# Altium PCB Thruster_Board.PcbDoc
Units mil, origin at the board's own origin, x right, y up, seen from the top; angles counter-clockwise.
Board outline 6000 x 4000 mil, 2 copper layers (Top Layer, Bottom Layer); 30 components, 18 nets, 91 pads, 0 vias.
Unrouted connection lines stored in the file: 64.
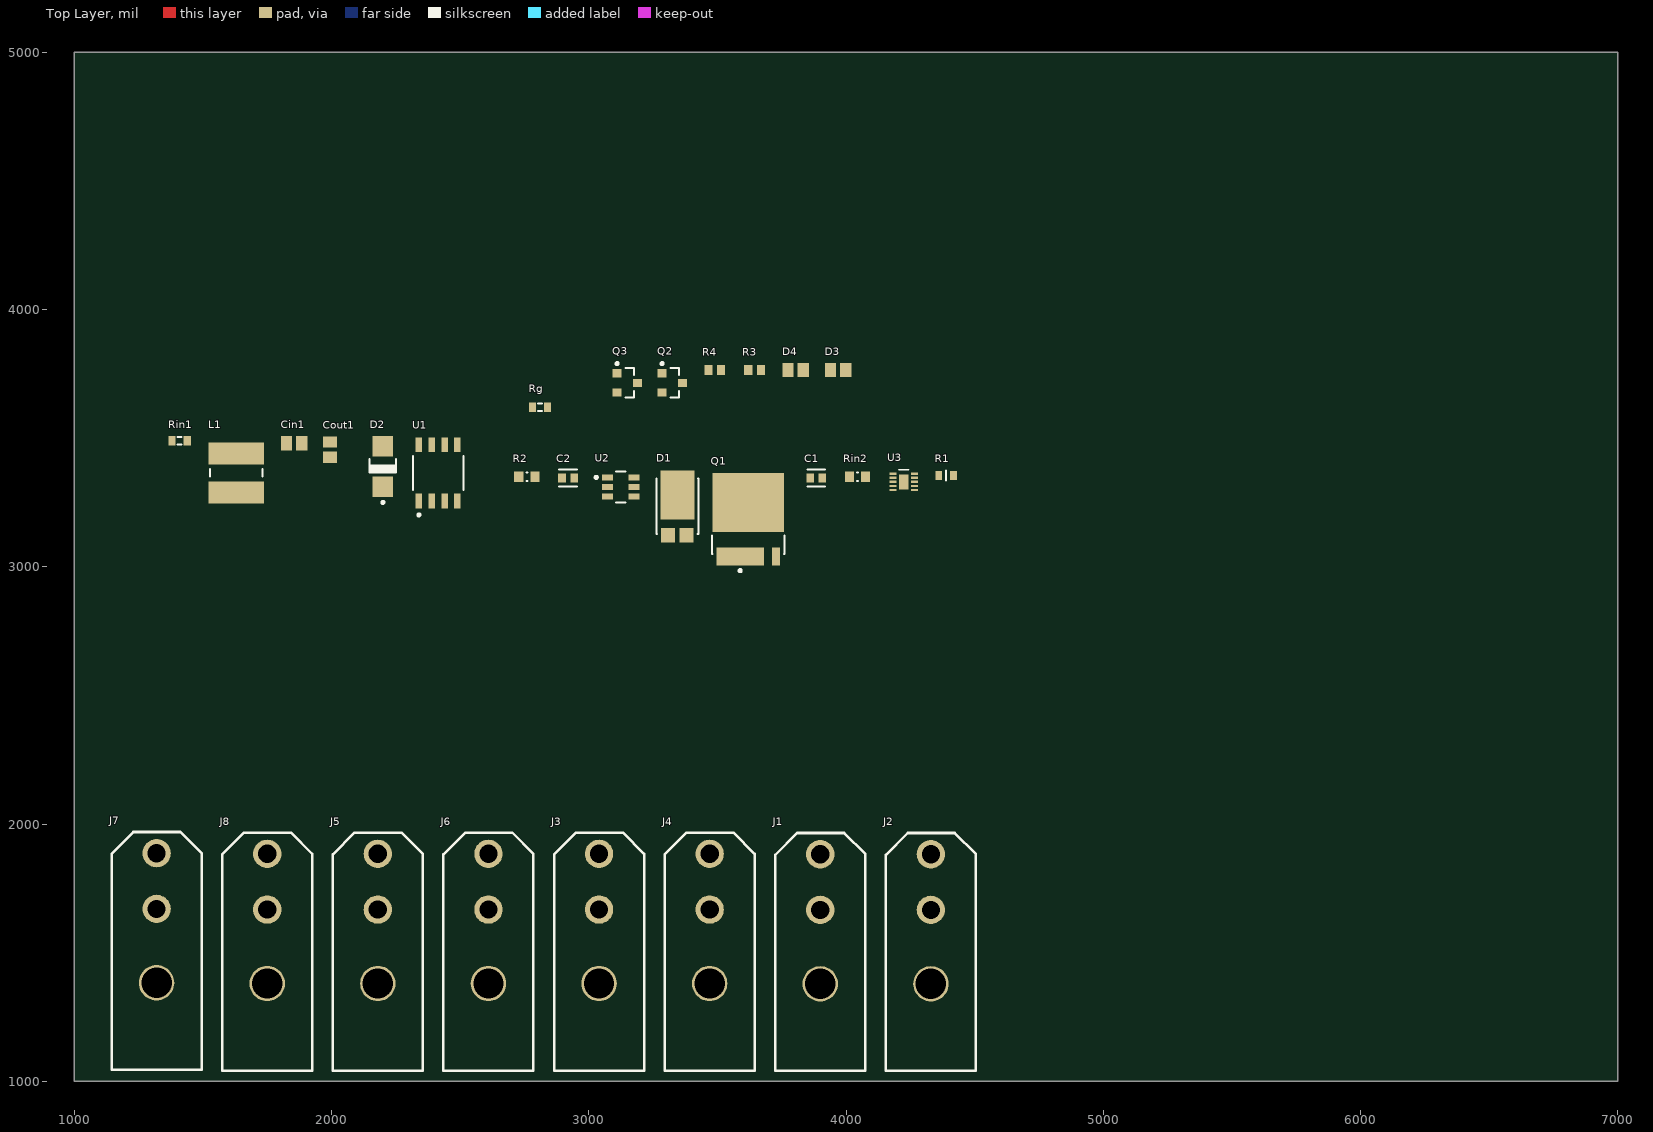
[diagram p0: Top Layer view]
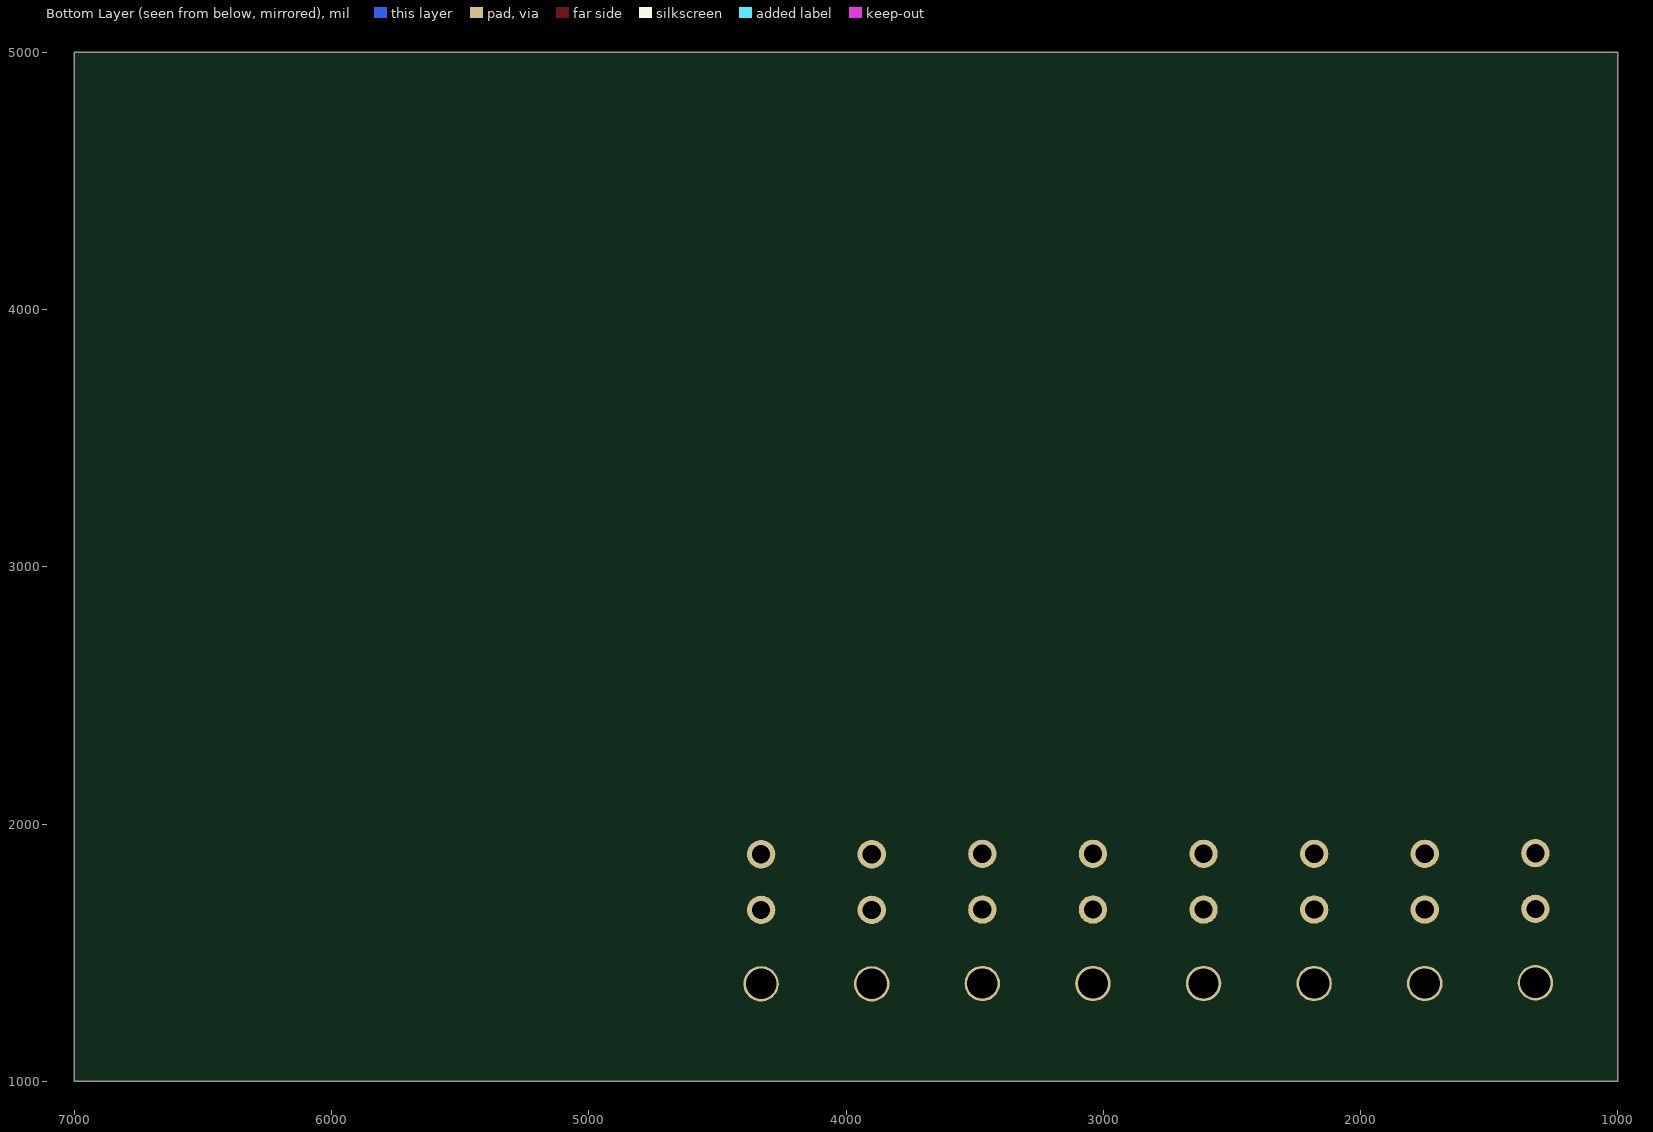
[diagram p1: Bottom Layer view, seen from below]

## Layer stack, top to bottom
Top Solder: solder mask 0.4, Solder Resist, Dk 3.5
Top Layer: signal copper 1.4
Dielectric 1: dielectric 12.6, FR-4, Dk 4.8
Bottom Layer: signal copper 1.4
Bottom Solder: solder mask 0.4, Solder Resist, Dk 3.5

## Board outline
1000,1000 7000,1000 7000,5000 1000,5000

## Design rules (kind name [scope] priority, off if disabled: settings)
Clearance [All] p1: gap=10 ignorepadtopadclearanceinfootprint=FALSE except(0: Arc-Hole Track-Hole SMDPad-Hole THPad-Hole Via-Hole Fill-Hole Poly-Hole Region-Hole Text-Hole)
PolygonConnect [All] p1: connectstyle=Relief reliefconductorwidth=10 reliefentries=4 polygonreliefangle="90 Angle" airgapwidth=10
RoutingVias [All] p1: holewidth=28 width=50 viastyle="Through Hole" minholewidth=28 minwidth=50 maxholewidth=28 maxwidth=50
SolderMaskExpansion [All] p1: expansion=4 istentingtop=FALSE
Width [All] p1: maxlimit=10 minlimit=10 preferedwidth=10
30 further rules are at their usual default settings.

## Components (designator, comment, footprint, x,y, rotation, side; value= is the part's Value field where it differs from the comment)
C1 "0.1uF" FP-C0603C-CF-MFG 3884.5,3345 r0 top value="0.10 μF"
C2 "0.1uF" FP-C0603C-CF-MFG 2919.5,3345 r0 top value="0.10 μF"
Cin1 "X7R" C0805 1854.5,3480 r0 top value=1uF
Cout1 "X7R" C0805 1994.5,3455 r90 top value=1uF
D1 "SBRT15U50SP5-13" FP-PowerDI5-MFG 3344.5,3235 r90 top
D2 "1SMA5931BT3G" ONSC-SMA-2-403D-02_F_V 2199.5,3390 r90 top
D3 "LED RED" C0805 3969.5,3765 r0 top
D4 "LED RED" C0805 3804.5,3765 r0 top
J1 "" "2-pin Megafit RA" 3900,1040 r0 top
J2 "" "2-pin Megafit RA" 4330,1040 r0 top
J3 "" "2-pin Megafit RA" 3040,1041.42 r0 top
J4 "" "2-pin Megafit RA" 3470,1041.42 r0 top
J5 "" "2-pin Megafit RA" 2180,1041.42 r0 top
J6 "" "2-pin Megafit RA" 2610,1041.42 r0 top
J7 "" "2-pin Megafit RA" 1320,1044.02 r0 top
J8 "" "2-pin Megafit RA" 1750,1041.42 r0 top
L1 "74477420" WE-PD2-M 1629.5,3365 r90 top
Q1 "IAUA250N04S6N007AUMA1" FP-PG-HSOF-5-MFG 3620,3185 r0 top
Q2 "NVTR01P02LT1G" ONSC-SOT-23-3-318-08_V 3324.5,3715 r0 top
Q3 "NVTR01P02LT1G" ONSC-SOT-23-3-318-08_V 3149.5,3715 r0 top
R1 "7.5K 0.1W 1%" FP-ERJ3EK-MFG 4389.5,3355 r0 top
R2 "10K" RESC0603(1608)_N 2759.5,3350 r0 top value="10000.00 Ohm"
R3 "100R" RESC1609X50X30NL10T20 3644.5,3765 r0 top
R4 "100R" RESC1609X50X30NL10T20 3489.5,3765 r0 top
Rg "0603" J1-0603 2810,3620 r0 top value=100R
Rin1 "0603" J1-0603 1409.5,3490 r0 top value=10k
Rin2 "10K" RESC0603(1608)_N 4044.5,3350 r0 top value="10000.00 Ohm"
U1 "AUIR3241STR" FP-PG-DSO-8-MFG 2414.5,3365 r90 top
U2 "SN74LVC1G97DBVR" FP-DBV0006A-MFG 3124.5,3310 r0 top
U3 "Part Number: INA300AIDSQT" DSQ10_P9X1P5 4224.5,3330 r0 top value=Value

## Footprints (in the part's own frame and the unit in brackets; to place one, negate y for a bottom-side part, rotate by r counter-clockwise, add the part's x,y. Pads: shape width x height; smd on the part's side, far side on the other; paste and mask are expansions set on the pad)
"2-pin Megafit RA" [mm]
  round 2.8 hole 1.8: 1(0,15.9) 2(0,21.4)
  round 3.5 hole 3: ""(0,8.6)
  silkscreen extent -4.44,0 4.44,23.49, body extent -4.16,-24.98 4.19,21.9, height 16.75
C0805 [mm] "Chip Capacitor, Body 2.0x1.3mm, IPC High Density"
  rect 1.1x1.4 smd: 1(-0.75,0) 2(0.75,0)
  body extent -1.1,-0.72 1.1,0.72, height 1.4
DSQ10_P9X1P5 [mm]
  rect 0.7x0.23 smd paste-0.115 mask+0: 1(-1.05,0.8) 2(-1.05,0.4) 3(-1.05,0) 4(-1.05,-0.4) 5(-1.05,-0.8) 6(1.05,-0.8) 7(1.05,-0.4) 8(1.05,0) 9(1.05,0.4) 10(1.05,0.8)
  rect 0.914x1.499 smd paste-0.737 mask-0.737: 11(0,0)
  Top Layer region: 0,0.749 0,0.749 0,0.749 0,0.749 0,0.749 0,0.749 0,0.749 0,0.749
  Top Layer region: 0,-0.749 0,-0.749 0,-0.749 0,-0.749 0,-0.749 0,-0.749 0,-0.749 0,-0.749
  silkscreen extent -0.5,1.18 0.5,1.18, body extent -1.05,-1.05 1.05,1.05, height 0.79
FP-C0603C-CF-MFG [mm]
  rect 0.75x0.9 smd paste+0 mask+0: 1(-0.6,0) 2(0.6,0)
  silkscreen extent -0.87,-0.85 0.88,0.85, body extent -1.2,-0.6 1.2,0.6, height 0.25
FP-DBV0006A-MFG [mm]
  rrect17% 1.1x0.6 smd paste+0 mask+0: 1(-1.3,0.95) 2(-1.3,0) 3(-1.3,-0.95) 4(1.3,-0.95) 5(1.3,0) 6(1.3,0.95)
  silkscreen extent -2.55,-1.53 0.45,1.53, body extent -1.95,-1.78 1.95,1.78, height 0.25
FP-ERJ3EK-MFG [mm]
  rect 0.65x0.9 smd paste+0 mask+0: 1(-0.725,0) 2(0.725,0)
  silkscreen extent 0,-0.48 0,0.48, body extent -1.15,-0.58 1.15,0.58, height 0.25
FP-PG-DSO-8-MFG [mm]
  rect 1.45x0.65 smd paste+0 mask+0: 1(-2.775,1.905) 2(-2.775,0.635) 3(-2.775,-0.635) 4(-2.775,-1.905) 5(2.775,-1.905) 6(2.775,-0.635) 7(2.775,0.635) 8(2.775,1.905)
  silkscreen extent -4.27,-2.5 1.68,2.5, body extent -3.6,-2.6 3.6,2.6, height 0.25
FP-PG-HSOF-5-MFG [mm]
  rect 4.7x1.75 smd paste-1000 mask+0: 1-2-3-4(-0.8,-3.675)
  rect 0.8x1.75 smd paste-1000 mask+0: 5(2.75,-3.675)
  rect 7.1x5.8 smd paste-1000 mask+0: 6(0,1.651)
  silkscreen extent -3.6,-5.2 3.6,-1.62, body extent -3.7,-4.65 3.7,4.65, height 0.25
FP-PowerDI5-MFG [mm]
  rect 1.4x1.39 smd paste+0 mask+0: 1(-2.862,0.92) 3(-2.862,-0.92)
  rect 4.86x3.36 smd paste+0 mask+0: 2(1.12,0)
  silkscreen extent -2.73,-2.07 2.73,2.07, body extent -3.66,-2.12 3.65,2.12, height 0.25
J1-0603 [mm] "Chip Resistor, Body 1.6x0.8mm, IPC High Density"
  rect 0.7x0.9 smd: 1(-0.75,0) 2(0.75,0)
  silkscreen extent -0.2,-0.35 0.2,0.35, body extent -0.85,-0.48 0.85,0.48, height 0.9
ONSC-SMA-2-403D-02_F_V [mm] "Molded, 2-Leads, Body 4.32x2.6mm"
  rect 2x2 smd: 1(-2,0) 2(2,0)
  silkscreen extent -3.67,-1.3 0.74,1.3, body extent -2.16,-1.3 2.16,1.3, height 2.2
ONSC-SOT-23-3-318-08_V [mm] "SOT23, 3-Leads, Body 2.92x1.3mm, Pitch 0.95mm"
  rect 0.9x0.8 smd: 1(-1,0.95) 2(-1,-0.95) 3(1,0)
  silkscreen extent -1.12,-1.46 0.65,2.02, body extent -0.65,-1.46 0.65,1.46, height 1.11
RESC0603(1608)_N [mm] "Chip Resistor, Body 1.6x0.8mm, IPC Medium Density"
  rect 0.9x1 smd: 1(-0.8,0) 2(0.8,0)
  silkscreen extent -0.05,-0.4 0.05,0.4, body extent -0.85,-0.47 0.85,0.47, height 0.6
RESC1609X50X30NL10T20 [mm] "Chip Resistor, 2-Leads, Body 1.55x0.85mm, IPC Medium Density"
  rect 0.8x0.95 smd: 1(-0.625,0) 2(0.625,0)
  body extent -0.82,-0.48 0.82,0.48, height 0.5
WE-PD2-M [mm] "SMD Inductor, 2-Leads, Body 5.8 x 5.2 mm"
  rect 2.15x5.5 smd: 1(-1.925,0) 2(1.925,0)
  silkscreen extent -0.38,-2.6 0.38,2.6, body extent -2.89,-2.6 2.89,2.6, height 4.49

## Part data
C1 C2: library part CMP-1035-02580-3, "CAP CER 0.1UF 10V X7R 0603", Capacitance="0.10 μF", Manufacturer=KEMET, Manufacturer Part Number=C0603C104K8RACTU, Package=C0603C-CF, Temperature="-55°C to +125°C", Temperature Characteristic=X7R, Temperature Coefficient=30ppm/°C, Temperature Range High=+125°C, Temperature Range Low=-55°C, Tolerance=0.1, Voltage Rating="10 V", Automotive=Yes, Automotive Grade="Grade 1", Category=Cap, ComponentLink2Description=Datasheet, ComponentLink2URL=https://api.kemet.com/component-edge/download/datasheet/C0603C100J5GACAUTO.pdf, Device Class L1="Passive Components", Device Class L2=Capacitors, Device Class L3="Ceramic Capacitors", Digikey Description="CAP CER 0.1UF 10V X7R 0603", Height=0.87mm, Lead Free=Yes, Material=Ceramic, Mouser Description="Multilayer Ceramic Capacitors MLCC - SMD/SMT 10volts 0.1uF X7R 10%", Octopart=https://octopart.com/c0603c104k8ractu-kemet-145075, RoHS=TRUE
Cin1 Cout1: library part Cap, "Capacitor", LatestRevisionDate=17-Jul-2002, LatestRevisionNote="Re-released for DXP Platform.", PackageDescription="Radial Cap, Thru-Hole; 2 Leads; 0.3 in Pin Spacing", PackageReference=RAD-0.3, Published=8-Jun-2000, Publisher="Altium Limited"
D1: library part CMP-12791-000016-1, "50V 15A Rectifier Schottky Diode", Forward Current=3A, Manufacturer="Diodes Inc.", Manufacturer Part Number=PDS3200-13, Max Junction Temp=+150°C, Max Repetitive Reverse Voltage=200V, Max Surge Forward Current=180A, Package=PowerDI5, Peak Reverse Current=1uA, Temperature="-65°C to +150°C", Temperature Range Low=-65°C, Automotive=No, Category=Diode, ComponentLink2Description=Datasheet, ComponentLink2URL=https://www.diodes.com/assets/Datasheets/ds30470.pdf, Device Class L1="Discrete Semiconductors", Device Class L2=Diodes, Device Class L3="Rectifier Diodes", Digikey Description="DIODE SCHOTTKY 200V 3A POWERDI5", Footprint Url=https://www.diodes.com/assets/Package-Files/PowerDI5.pdf, Height=1.15mm, Lead Free=Yes, Mouser Description="PDS3200 Series 200 V 3 A High Voltage Schottky Barrier Rectifier - PowerDI-5", Octopart=https://octopart.com/pds3200-13-diodes+inc.-332544, Reverse Voltage=200V, RoHS=TRUE, Standoff Height=0mm, Temperature Range High=+150°C
D2: library part CMP-1060-00118-1, "1.5 W Zener Voltage Regulator, 2-Pin SMA, Pb-Free, Tape and Reel", Manufacturer="On Semiconductor", ComponentLink1Description="Manufacturer URL", ComponentLink1URL=http://www.onsemi.com/, ComponentLink2Description=Datasheet, ComponentLink2URL=http://www.onsemi.com/pub_link/Collateral/1SMA5913BT3-D.PDF, ComponentLink3Description="Package Specification", ComponentLink3URL=http://www.onsemi.com/pub_link/Collateral/1SMA5913BT3-D.PDF, DatasheetVersion="Rev. 8", Mounting Technology="Surface Mount", PackageDescription="2-Pin Small Molded Package, J-Bend Lead, Body 2.605 x 4.315 mm", PackageReference=SMA-2-403D-02_F, PackageVersion="Rev. F, 11/2008", Packing="Tape and Reel", PartNumber=1SMA5931BT3G, RoHS=Pb-Free, VZ Typ (V)=18
D3 D4: library part LED0, "led /  LTST-C171KRKT", Color=Red, Current - Test=20mA, Lens Color=Colorless, Manufacturer="Lite-On Inc.", Manufacturer Part Number=LTST-C171KRKT, Millicandela Rating=54mcd, Package / Case="0805 (2012 Metric)", Supplier Part Number 1=160-1427-1-ND, Voltage - Forward (Vf) (Typ)=2V, Category=Optoelectronics, ComponentLink1Description=http://optoelectronics.liteon.com/upload/download/DS22-2000-109/LTST-C171KRKT.pdf, ComponentLink1URL=http://optoelectronics.liteon.com/upload/download/DS22-2000-109/LTST-C171KRKT.pdf, Features=-, Height (Max)=0.80mm, Lens Style/Size="Rectangle with Flat Top, 1.40mm x 1.25mm", Lens Transparency=Clear, Mounting Type="Surface Mount", Packaging="Cut Tape (CT)", Part Status=Active, Pricing 1="1=0.31, 10=0.225, 25=0.1656, 100=0.1183, 250=0.0804, 500=0.07096, 1000=0.05558 (USD)", RoHS="RoHS Compliant", Size / Dimension="2.00mm L x 1.25mm W", Stock 1=260544, Supplier 1=Digi-Key, Viewing Angle=130°, Wavelength - Dominant=631nm, Wavelength - Peak=639nm
J1 J2 J3 J4 J5 J6 J7 J8: library part "2-pin megafit"
L1: library part CMP-0227-00441-1, "SMD Power Inductor WE-PD2, L = 100 µH", Inductance="100 ÂµH", ComponentLink1Description="Manufacturer Link", ComponentLink1URL=http://www.we-online.com, ComponentLink2Description=Datasheet, ComponentLink2URL=http://www.we-online.de/katalog/media/pdf/74477420.pdf, DatasheetVersion="ver 2, Jun-2005", PackageDescription="SMD Inductor, 2-Leads, Body 5.8 x 5.2 mm", PackageReference=WE-PD2-M, PackageVersion=2005
Q1: library part CMP-32901-001165-1, "MOSFET_(20V 40V) PG-HSOF-5"
Q2 Q3: library part CMP-1058-00752-1, "Power MOSFET, -20 V, -1.3 A, P-Channel, 3-Pin SOT-23, Pb-Free, Tape and Reel", Manufacturer="On Semiconductor", Package Type=SOT-23-3, Channel Polarity="P Channel", Ciss Typ (pF)=225, ComponentLink1Description="Manufacturer URL", ComponentLink1URL=http://www.onsemi.com/, ComponentLink2Description=Datasheet, ComponentLink2URL=http://www.onsemi.cn/pub_link/Collateral/NTR1P02LT1-D.PDF, ComponentLink3Description="Package Specification", ComponentLink3URL=http://www.onsemi.cn/pub_link/Collateral/318-08.PDF, Configuration=Single, Coss Typ (pF)=130, Crss Typ (pF)=55, DatasheetVersion="Rev. 13", ID Max (A)=1.3, Mounting Technology="Surface Mount", PackageDescription="3-Pin Small Outline Transistor, Body 2.92 x 1.3 mm, Pitch 0.95 mm", PackageReference=SOT-23-3-318-08, PackageVersion="Rev. AP, 11/2009", Packing="Tape and Reel", PartNumber=NVTR01P02LT1G, PD Max (W)=0.4, Qrr Typ (nC)=8.5, RoHS=Pb-Free, V(BR)DSS Min (V)=20, VGS Max (V)=12, VGS(th) Max (V)=1.25
R1: library part CMP-2000-00636-2, "RES SMD 7.5K OHM 1% 1/10W 0603", Case Code (Imperial)=0603, Case Code (Metric)=1608, Max Operating Temperature=155°C, Max Power Dissipation=100mW, Min Operating Temperature=-55°C, Package Quantity=1, Resistance=7.5kR, Resistance Tolerance=1%, Resistor Type="Thick Film", Temperature Coefficient=100ppm/°C, Voltage Rating=75V, Voltage Rating (DC)=50V, Case/Package=0603, Construction=Rectangular, Contact Plating=Tin, Depth=0.8mm, Features="Automotive AEC-Q200", Height=0.022inch, Lead Free="Lead Free", Length=1.6mm, Military Standard=Not, Mount="Surface Mount", Number of Terminations=2, Packaging="Tape and Reel", Power Rating=100mW, Radiation Hardening=No, REACH SVHC="No SVHC", RoHS Compliant=Yes, Series=ERJ, Termination=SMD/SMT, Tolerance=1%, Width=0.8mm
R2 Rin2: library part CMP-1012-00098-1, "10K 0.1W 5% 0603 (1608 Metric)  SMD", Case-EIA=0603, Case-Metric=1608, Power="0.1 W", Tolerance="5 %", Technology=SMT
R3 R4: library part CMP-1012-00050-2, "100R 0.1W 5%", Manufacturer="Vishay Dale", Part Number=CRCW0603100RJNTA
Rg Rin1: library part Res3, "Resistor", LatestRevisionDate=29-May-2009, LatestRevisionNote="IPC-7351 Footprint Added.", PackageDescription="Chip Resistor", PackageReference=J1-0603, Published=8-Jun-2000, Publisher="Altium Limited"
U1: library part CMP-32851-000034-1, "IC GATE DRVR HIGH-SIDE 8SO", Case/Package=SOIC, Max Operating Temperature=150°C, Min Operating Temperature=-40°C, Output Current=300mA, Halogen Free="Halogen Free", Lead Free="Lead Free", Mount="Surface Mount", Number of Drivers=1, Number of Pins=8, Packaging="Cut Tape", RoHS Compliant=Yes
U2: library part CMP-0859-00234-4, "IC CONFIG MULT-FUNC GATE SOT23-6", Ambient Temperature Range High=+125°C, Ambient Temperature Range Low=-40°C, Manufacturer="Texas Instruments", Max Junction Temp=+150°C, Max Supply Voltage=5.5V, Min Supply Voltage=1.65V, Nominal Supply Current=10uA, Package=DBV0006A, Temperature="-40°C to +125°C", Automotive=No, Category=IC, ComponentLink2Description=Datasheet, ComponentLink2URL=http://www.ti.com/lit/ds/symlink/sn74lvc1g97.pdf, Device Class L1="Integrated Circuits (ICs)", Device Class L2="Logic ICs", Device Class L3="Logic Gates", Digikey Description="IC CONFIG MULT-FUNC GATE SOT23-6", Height=1.45mm, Ipc Land Pattern Name=SOT95P280X145-6, Lead Free=Yes, Logic Function Desc=Dual, Manufacturer Part Number=SN74LVC1G97DBVR, Mouser Description="Logic Gates Cnfgrble Mult Function Gate", Number Of Circuits=1, Number Of Inputs=3, Number of Outputs=1, Octopart=https://octopart.com/sn74lvc1g97dbvr-texas+instruments-464842, Propagation Delay=6.1ns, RoHS=TRUE, Standoff Height=0mm, Temperature Range High=+125°C, Temperature Range Low=-40°C
U3: library part INA300AIDSQT, "No Description Available", Built_By=EMA_UL_Team, Copyright="Copyright (C) 2018 Accelerated Designs. All rights reserved", Manufacturer_Part_Number=INA300AIDSQT, RefDes=RefDes, Type=DEV, Vendor="Texas Instruments"

## Nets (pads, with @x,y where several pads share a name; then routed paths per layer and width w, separated by ;. In a path a pad name is that pad's centre, name@x,y a point inside that pad or via, vN(x,y) a via of type N, cw(c..) or ccw(c..) an arc to the next point about the centre after c; other vN are vias at no path point)
GATE_EN: Rin1.2 U1.1 U2.4
GND: C1.1 C2.1 Cin1.1 D1.1 D1.3 J1.1 J2.1 J3.1 J4.1 J5.1 J6.1 J7.1 J8.1 R1.2 R2.2 R3.2 R4.2 Rin1.1 U1.2 U2.2 U3.6 U3.8 U3.10 U3.11
NetCout1_1: Cout1.1 U1.8
NetD3_1: D3.1 R3.1
NetD3_2: D3.2 Q2.3
NetD4_1: D4.1 R4.1
NetD4_2: D4.2 Q3.3
NetL1_1: L1.1 U1.4
NetR1_1: R1.1 U3.3
NetRg_1: Rg.1 U1.6
OCP_N: Q3.1 Rin2.1 U2.3 U3.5
SENSE+: U3.1
SENSE-: U3.2
THRST_EN: Q2.1 R2.1 U2.6
THRUSTERS_GATE: D2.1 Q1.5 Rg.2
VBAT: Cin1.2 Cout1.2 L1.2 Q1.6 U1.7
VBAT_THRUSTERS: D1.2 D2.2 J1.2 J2.2 J3.2 J4.2 J5.2 J6.2 J7.2 J8.2 Q1.1-2-3-4 U1.5
VCC_3V3: C1.2 C2.2 Q2.2 Q3.2 Rin2.2 U2.1 U2.5 U3.4 U3.7 U3.9
pads on no net: J1. J2. J3. J4. J5. J6. J7. J8. U1.3